# Altium PCB ESP32-USBC.PcbDoc (part 3 of 3)
Units mil, origin at the board's own origin, x right, y up, seen from the top; angles counter-clockwise.
Board outline 2700 x 1000 mil, 4 copper layers (L1, L2, L3, L4), stack 61.583 mil thick; 64 components, 73 nets, 299 pads, 160 vias.
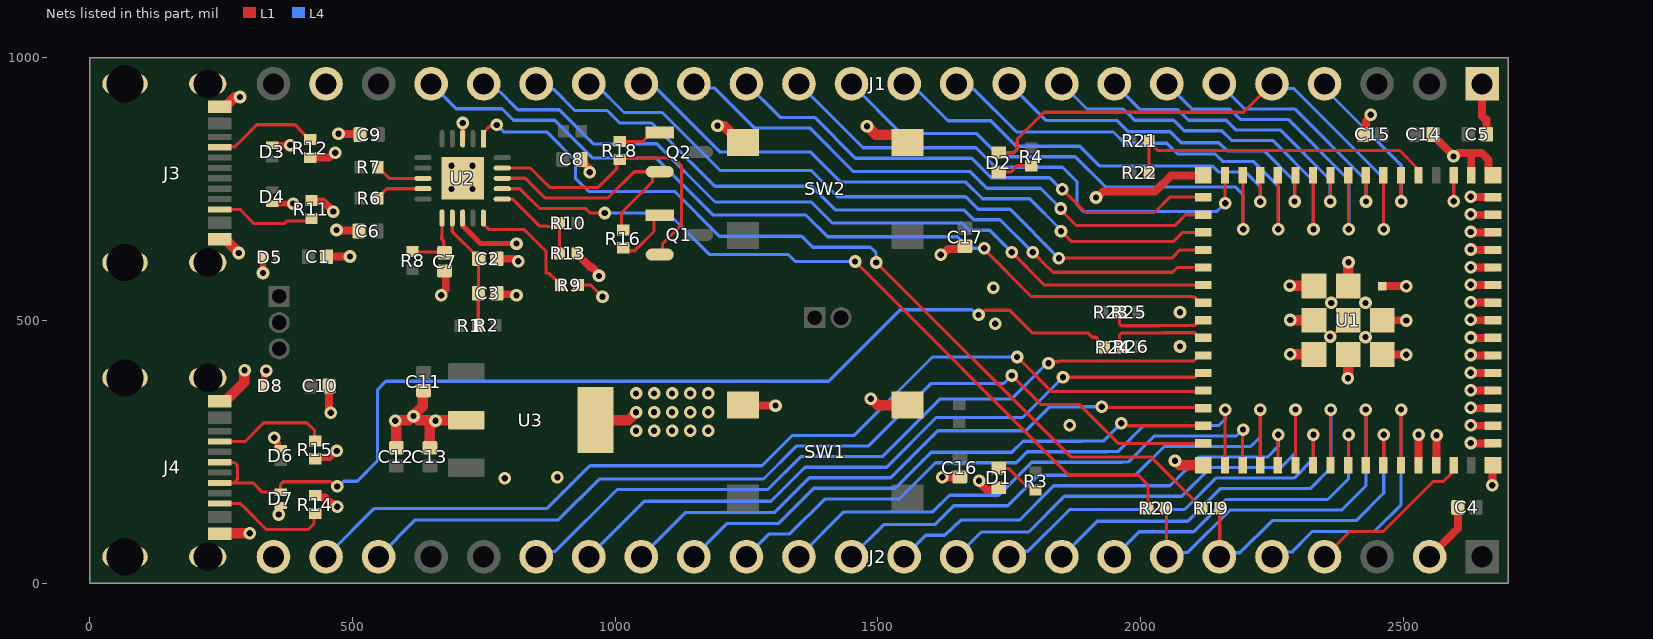
[diagram p4: the nets of this part, all layers, seen from the top]

## Via types
v1: diameter 24, hole 12, L1 to L4, tented both sides, 160 vias

## Nets (pads, with @x,y where several pads share a name; then routed paths per layer and width w, separated by ;. In a path a pad name is that pad's centre, name@x,y a point inside that pad or via, vN(x,y) a via of type N, cw(c..) or ccw(c..) an arc to the next point about the centre after c; other vN are vias at no path point) (continued)
CONN2_USB_P: D7.2 J4.A6 J4.B6 R24.1 | length 2039.3
  L1 w6.03: J4.B6@247.64,190.55 311.05,190.55 328.65,172.95 D7.2@363.65,172.95 363.65,187.64 368.79,192.79 458.68,192.79 467.67,183.8 v1(471.2,183.8) ; J4.A6@247.64,229.92 248.15,229.41 275.79,229.41 281.29,223.91 281.29,197.22 275.77,191.7 ; v1(1691.7,510.2) 1695.23,510.2 1704.22,519.18 1751.32,519.18 1795.02,475.48 1900.5,475.48 1908.3,467.68 1915.49,467.68 1915.49,465.68 1930.99,450.18 R24.1@1930.99,449
  L4 w6.03: v1(471.2,183.8) 473.8,183.8 483.72,193.72 509.26,193.72 547.9,232.36 547.9,367.9 563.82,383.82 1406.48,383.82 1542.84,520.17 1679.18,520.17 1689.15,510.2 v1(1691.7,510.2)
DTR_FTDI: Q2.2 R16.1 U2.18 | length 474.6
  L1 w6: U2.18@785.57,770.16 814.84,770.16 ; 814.68,770 815,770.32 829.18,770.32 861.8,737.7 866.65,732.85 986.65,732.85 1036.4,782.6 Q2.2@1077.09,782.6 ; R16.1@1015.9,671.91 1012.56,675.25 1012.56,704.95 1071.31,763.7 1071.31,776.81 Q2.2@1077.09,782.6 ; Q2.2@1085,782.6 Q2.2@1077.09,782.6
ESP_USB_N: R23.2 R25.2 U1.23 | length 188.1
  L1 w6.03: R25.2@1960.98,515 1960.03,514.05 1960.03,493.24 1963.57,489.71 2034.29,489.71 2034.86,490.28 2103.18,490.28 2106.72,493.82 2106.72,495.14 2111.57,500 U1.23@2119.45,500
ESP_USB_P: R24.2 R26.2 U1.24 | length 191.1
  L1 w6.03: R24.2@1965.01,449 1960.03,453.97 1960.03,472.15 1963.57,475.68 2040.1,475.68 2040.68,476.25 2103.18,476.25 2106.72,472.72 2106.72,471.39 2111.57,466.54 U1.24@2119.45,466.54
FTDI_RESET: C7.2 R8.2 U2.11 | length 118.8
  L1 w6: R8.2@614.61,630.66 615.67,629.6 674.57,629.6 C7.2@675.62,628.55 673.88,630.3 673.88,650.29 670.32,653.85 670.32,660.36 670.79,660.83 U2.11@670.79,683.06
FTDI_USB_N: R6.2 U2.9 | length 93.9
  L1 w6.03: R6.2@548.9,732.19 548.9,733.37 565.85,750.32 591.66,750.32 U2.9@634.59,750.32
FTDI_USB_P: R7.2 U2.8 | length 95.5
  L1 w6.03: R7.2@548.56,791.2 548.56,790.02 556.17,782.4 557.56,782.4 569.97,770 591.66,770 U2.8@634.59,770
GND: C1.1 C2.1 C3.1 C4.1 C5.1 C6.1 C7.1 C8.1 C9.1 C10.1 C11.1 C12.1 C13.1 C14.1 C15.1 C16.1 C17.1 D1.1 D3.1 D4.1 D5.1 D6.1 D7.1 D8.1 J1.1 J1.23 J2.2 J2.24 J3.A1B12 J3.B1A12 J3.S1 J3.S2 J3.S3 J3.S4 J4.A1B12 J4.B1A12 J4.S1 J4.S2 J4.S3 J4.S4 R9.2 R11.1 R12.1 R13.1 R14.1 R15.1 SW1.3 SW1.4 SW2.3 SW2.4 U1.1 U1.2 U1.42 U1.43 U1.46 U1.47 U1.48 U1.49 U1.50 U1.51 U1.52 U1.53 U1.54 U1.55 U1.56 U1.57 U1.58 U1.59 U1.60 U1.61 U1.62 U1.63 U1.64 U1.65 U1.66 U1.67 U1.68 U1.69 U1.70 U1.71 U1.72 U1.73 U2.3 U2.13 U2.21 U3.2 U3.4 | length 4059.7
  L1 w6: R9.2@930.05,567.05 953.95,567.05 v1(976,545) ; v1(2360.55,469) 2364.04,469 U1.61@2395.04,500 ; U1.2@2595.83,775.59 2595.83,726.57 v1(2596.11,726.28)
  L1 w10.01: U2.13@710,694.59 710,680.2 723.15,667.05 744.01,646.19 812.26,646.19 v1(812.55,645.9) ; U2.3@710,845.41 v1(710,875.33)
  L1 w12: v1(330,590) D5.1@330,620 ; D8.1@331.3,375.1 332.19,375.99 332.19,397.1 336.1,401 v1(336.1,404.25) ; D4.1@347.32,722.06 v1(387.32,722.06) ; D3.1@347.3,833.1 347.45,833.25 381.9,833.25 v1(382.05,833.4) ; v1(351.35,276.35) 351.35,273.1 357.94,266.51 357.94,256.18 358.83,255.29 D6.1@363.75,255.29 ; v1(360.3,130.3) 361.97,131.97 361.97,146.47 362.86,147.36 D7.1@363.65,147.36
  L1 w15: R12.1@420,810 456.08,810 464.93,818.85 v1(467.36,818.85) v1@465.64,817.13 ; R11.1@422.3,727.81 424.3,725.81 444.56,725.81 v1(463.55,706.82) ; R14.1@429.65,166.31 432.78,163.18 448.58,163.18 459.86,151.9 462.11,151.9 468.81,145.2 v1(471.25,145.2) ; R15.1@429.65,236.39 432.78,239.52 456.24,239.52 468.11,251.4 v1(470.55,251.4) ; C1.1@451.11,620.95 451.29,621.12 495.47,621.12 v1(495.65,621.3) ; C10.1@456.05,375.15 456.05,369 455.53,368.48 455.53,329.81 458.9,326.44 v1(458.9,324) ; v1(469.95,671.77) 470.99,670.74 511.52,670.74 C6.1@512.56,669.7 ; v1(473.7,854.95) 474.57,854.08 513.75,854.08 C9.1@514.62,853.21 ; v1(669.1,547.75) 669.1,550.19 677.76,558.85 677.76,591.85 C7.1@675.62,593.98 ; C3.1@774.88,551.35 776.81,549.42 810.79,549.42 v1(812.52,547.7) ; C2.1@775.05,617.01 808.66,617.01 813.41,612.25 v1(815.85,612.25) ; R13.1@928.21,627.06 928.21,625.88 952.55,601.54 955.69,601.54 967.78,589.45 967.78,586.12 v1(969.5,584.4) ; C8.1@935.1,806.25 935.1,804.68 949.83,789.95 949.83,783.17 v1(951.55,781.45) ; SW1.4@1243.5,338.58 1244.39,337.7 v1(1305.35,337.7) ; v1(1619.9,624.6) 1622.34,624.6 1633.35,635.62 1660.9,635.62 C17.1@1666,640.72 ; v1@1622,200.25 v1(1622.88,201.12) 1655.12,201.12 C16.1@1656,202 ; v1@1692.7,192.01 v1(1692.7,194.45) 1692.7,191.79 1707.5,176.99 1725.69,176.99 D1.1@1730,181.3 ; v1(1915.27,733.65) 1917.2,733.65 1928.55,745 2027.54,745 2058.13,775.59 U1.63@2119.45,775.59 ; C15.1@2424.13,853.55 2428.6,858.02 2428.6,879.22 2438.04,888.66 v1(2438.04,891.09) ; U1.68@2460,435.04 v1@2505.04,435.04 ; U1.67@2460,500 v1@2505.04,500 ; U1.66@2460,564.96 v1@2505.04,564.96 ; v1@2528.9,282 U1.42@2528.9,224.41 U1.42@2528.95,224.46 ; J2.2@2550,50 2603.72,103.72 C4.1@2603.72,144 ; C14.1@2556.47,853.55 2556.47,851.98 2595.4,813.04 v1(2595.4,811.75) 2597.84,811.75 2604.23,818.15 2624.5,818.15 ; U1.43@2562.36,224.41 2562.74,224.78 2562.74,280.54 v1(2563.24,281.04) ; U1.2@2595.4,784.64 2595.45,784.59 2595.45,775.96 U1.2@2595.83,775.59 ; v1@2628.79,265.75 U1.46@2670.63,265.75 ; v1@2628.79,299.21 U1.47@2670.63,299.21 ; v1@2628.79,332.68 U1.48@2670.63,332.68 ; v1@2628.79,366.14 U1.49@2670.63,366.14 ; v1@2628.79,399.61 U1.50@2670.63,399.61 ; v1@2628.79,433.07 U1.51@2670.63,433.07 ; v1@2628.79,466.54 U1.52@2670.63,466.54 ; v1@2628.79,500 U1.53@2670.63,500 ; v1@2628.79,533.46 U1.54@2670.63,533.46 ; v1@2628.79,566.93 U1.55@2670.63,566.93 ; v1@2628.79,600.39 U1.56@2670.63,600.39 ; v1@2628.79,633.86 U1.57@2670.63,633.86 ; v1@2628.79,667.32 U1.58@2670.63,667.32 ; v1@2628.79,700.79 U1.59@2670.63,700.79 ; v1@2628.79,734.25 U1.60@2670.63,734.25 ; U1.1@2629.29,775.59 2629.29,813.35 2624.5,818.15 ; J1.1@2650,950 2650,888 2656.32,881.68 ; C5.1@2657.97,855.97 2657.97,881.68 ; v1(2668.9,186.2) 2669.76,187.06 2669.76,223.54 U1.65@2670.63,224.41 ; U1.62@2670.63,775.59 2662.38,783.84 2662.38,804.87 2649.1,818.15 2624.5,818.15
  L1 w20: J4.B1A12@247.64,94.09 248.09,94.55 304.55,94.55 v1(305,95) ; J4.A1B12@247.64,346.06 249.45,347.87 260.28,347.87 294.23,381.83 294.23,404.23 v1(295,405) ; J3.B1A12@247.64,653.94 258.46,653.94 283.85,628.55 v1(283.85,627.95) ; J3.A1B12@247.64,905.91 258.46,905.91 276.54,923.98 285.43,923.98 v1(286.2,924.75) ; C12.1@583.7,257.42 583.7,305.92 581.75,307.87 v1(581.75,308.95) 582.52,309.72 607.3,309.72 615.28,317.7 v1(616.37,317.7) ; C11.1@634.09,366.05 634.09,336.51 616.37,318.78 v1(616.37,317.7) ; C13.1@647.5,259.53 647.5,296.77 658.35,307.62 v1(658.35,308.7) ; U3.2@716.97,310 716.32,309.35 659,309.35 v1(658.35,308.7) ; U3.4@963.03,310 1025,310 v1(1040,325) ; v1(1195,870) 1195.77,869.23 1207.93,869.23 1238.58,838.58 SW2.4@1243.5,838.58 ; v1@1479.4,867.87 v1(1479.4,868.95) v1@1479.8,868.95 ; v1@1480.95,870.1 v1@1479.8,868.95 ; v1(1486.6,350.7) 1487.68,350.7 1499.8,338.58 SW1.3@1556.5,338.58 ; SW2.3@1556.5,838.58 1541.63,853.45 1495.98,853.45 1480.48,868.95 v1@1479.8,868.95 ; v1(2065.55,232.75) 2066.63,232.75 2074.97,224.41 U1.64@2119.45,224.41 ; v1(2284,566) 2284.52,565.48 2329.56,565.48 U1.71@2330.08,564.96 ; v1@2285.04,435.04 U1.73@2330.08,435.04 ; v1@2285.04,500 U1.72@2330.08,500 ; v1@2395.04,390 U1.70@2395.04,435.04 ; U1.69@2395.04,564.96 v1@2395.04,610 ; C5.1@2656.32,855.97 C5.1@2658.28,854 ; v1(616.37,317.7) 617.45,317.7 625.68,309.47 657.58,309.47 v1(658.35,308.7)
  other v1: 790.05,199.65 890.35,201.55 2628.04,266.5 2529,282 1040,290 1074.26,290 1108.53,290 1142.79,290 1177.05,290 1865,300 2628.04,299.96 1074.26,325 1108.53,325 1142.79,325 1177.05,325 2628.04,333.43 1040,360.8 1074.26,360.8 1108.53,360.8 1142.79,360.8 1177.05,360.8 2628.04,366.89 2394.52,389.48 2628.04,400.35 2628.04,433.82 2505.56,434.52 2284.52,435.56 2075,450 2628.04,467.28 2428,468 1723.4,493.2 2505.56,499.48 2284.52,500.52 2628.04,500.75 2075,515 2363,533 2428,533 2628.04,534.21 1720,562 2505.56,564.44 2628.04,567.68 2628.04,601.14 2395.56,610.52 2628.04,634.61 2628.04,668.07 2628.04,701.54 2628.04,735 688.86,749.66 728.56,749.66 688.86,793.86 728.56,793.86
GPIO0: R21.2 R22.2 U1.4 | length 608.3
  L1 w6: R22.2@2015.85,780.5 R21.2@2015.85,841.2 2015.85,840.02 2032.87,823 2492.86,823 2526.02,789.84 2526.02,778.46 U1.4@2528.9,775.59
GPIO1: J1.4 U1.5 | length 334.3
  L1 w6: U1.5@2495.43,775.59 2495.72,775.31 2495.72,726.28 v1(2496,726)
  L4 w6: J1.4@2350,950 2350,940.95 2496,794.95 v1(2496,726)
GPIO2: D2.1 J1.5 U1.6 | length 1071
  L1 w6: D2.1@1730,818.7 1758.78,818.7 1765.19,825.11 1765.19,844.84 1816.2,895.85 2195.85,895.85 J1.5@2250,950 ; v1@2461.97,673.96 U1.6@2461.97,775.59
  L4 w6: J1.5@2250,950 2258.65,941.35 2290.95,941.35 2462.45,769.85 v1(2462.45,673.48)
GPIO3: J1.6 U1.7 | length 449.3
  L1 w6: U1.7@2428.5,775.59 2428.75,775.34 2428.75,724.25 v1@2429,724
  L4 w6: J1.6@2150,950 2197.75,902.25 2293.2,902.25 2429,766.45 v1@2429,724
  other v1: 2429,726
GPIO4: J1.7 U1.8 | length 618.8
  L1 w6: U1.8@2395.04,775.59 2395.52,775.11 2395.52,673.48 v1(2396,673)
  L4 w6: J1.7@2050,950 2098.35,901.65 2170.07,901.65 2189.47,882.25 2280.75,882.25 2396,767 v1(2396,673)
GPIO5: J1.8 U1.9 | length 581.2
  L1 w6: v1@2361.29,722.29 2361.29,775.3 U1.9@2361.57,775.59
  L4 w6: J1.8@1950,950 1999.45,900.55 2071.17,900.55 2091.17,880.55 2162.88,880.55 2181.18,862.25 2265.65,862.25 2361,766.9 v1(2361,726)
GPIO6: J1.9 U1.10 | length 750.6
  L1 w6: U1.10@2328.11,775.59 2328.59,775.07 2328.59,673.48 v1(2329.07,673)
  L4 w6: J1.9@1850,950 1898.1,901.9 1967.2,901.9 1988.55,880.55 2062.88,880.55 2082.88,860.55 2154.6,860.55 2172.9,842.25 2251.7,842.25 2329.07,764.88 v1(2329.07,673)
GPIO7: J1.10 U1.11 | length 712.6
  L1 w6: v1@2293.82,721.82 2293.82,774.77 U1.11@2294.65,775.59
  L4 w6: J1.10@1750,950 1819.75,880.25 1954.77,880.25 1976.22,858.8 2056.35,858.8 2077.3,837.85 2149.01,837.85 2164.61,822.25 2235.55,822.25 2293,764.8 v1(2293,726)
GPIO8: J1.11 U1.12 | length 877.7
  L1 w6: U1.12@2261.18,775.59 2261.66,775.07 2261.66,673.48 v1(2262.14,673)
  L4 w6: J1.11@1650,950 1660.33,939.67 1682.73,939.67 1722.8,899.6 1723.03,899.6 1764.43,858.2 1948.53,858.2 1969.88,836.85 2050.01,836.85 2070.41,816.45 2142.13,816.45 2156.33,802.25 2214.55,802.25 2262.14,754.66 v1(2262.14,673)
GPIO9: J1.12 U1.13 | length 837.5
  L1 w6: U1.13@2227.72,775.59 2227.86,775.45 2227.86,725.74 v1(2228,725.6)
  L4 w6: J1.12@1550,950 1563.15,950 1633.55,879.6 1714.75,879.6 1763.15,831.2 1884.18,831.2 1921.53,793.85 2136.44,793.85 2148.04,782.25 2199.5,782.25 2228,753.75 v1(2228,725.6)
GPIO10: J1.13 U1.14 | length 1001.5
  L1 w6: U1.14@2194.23,775.57 2194.73,775.07 2194.73,673.48 v1(2195.21,673)
  L4 w6: J1.13@1450,950 1544.9,855.1 1688.33,855.1 1732.23,811.2 1875.9,811.2 1933.2,753.9 2180.1,753.9 2195.21,738.79 v1(2195.21,673)
GPIO11: J1.14 U1.15 | length 996.8
  L1 w6: v1(2160.85,722.95) U1.15@2160.79,775.59
  L4 w6: J1.14@1350,950 1471.7,828.3 1686.85,828.3 1723.95,791.2 1851.5,791.2 1878.9,763.8 1878.9,719.8 1892.05,706.65 2144.55,706.65 v1(2160.85,722.95)
GPIO12: J1.15 U1.16 | length 983
  L1 w6: v1(1851.1,749.25) 1895.35,705 2026.43,705 2055.68,734.25 U1.16@2119.45,734.25
  L4 w6: J1.15@1250,950 1314,886 1379.7,886 1457.4,808.3 1678.56,808.3 1715.66,771.2 1826.84,771.2 1848.79,749.25 v1(1851.1,749.25)
GPIO13: J1.16 U1.17 | length 1091.5
  L1 w6: v1(1848.25,712.6) 1848.25,709.8 1878.05,680 2064.67,680 2085.46,700.79 U1.17@2119.45,700.79
  L4 w6: J1.16@1150,950 1157.88,942.12 1188.58,942.12 1264.7,866 1370.5,866 1453.7,782.8 1675.78,782.8 1707.38,751.2 1809.65,751.2 v1(1848.25,712.6)
GPIO14: J1.17 U1.18 | length 1202.1
  L1 w6: v1(1848.6,669.65) 1868.25,650 2062.95,650 2080.27,667.32 U1.18@2119.45,667.32
  L4 w6: J1.17@1050,950 1060.33,939.67 1080.33,939.67 1200,820 1372.5,820 1429.7,762.8 1667.49,762.8 1699.09,731.2 1789.12,731.2 1848.6,671.72 v1(1848.6,669.65)
GPIO15: J1.18 U1.19 | length 1313.3
  L1 w6: v1(1844.6,618.25) 2059.49,618.25 2075.09,633.86 U1.19@2119.45,633.86
  L4 w6: J1.18@950,950 962.4,950 1017.02,895.38 1089.62,895.38 1200,785 1373.2,785 1423.2,735 1667.01,735 1690.81,711.2 1751.65,711.2 v1(1844.6,618.25)
GPIO16: J1.19 U1.20 | length 1421.8
  L1 w6: v1(1794.55,629.2) 1823.36,600.39 1824.27,600.39 1833.42,591.25 2060.77,591.25 2069.91,600.39 U1.20@2119.45,600.39
  L4 w6: J1.19@850,950 860.33,939.67 882.98,939.67 923.45,899.2 984.92,899.2 1008.73,875.38 1069.62,875.38 1190,755 1374.25,755 1419.25,710 1663.73,710 1682.53,691.2 1732.55,691.2 v1(1794.55,629.2)
GPIO17: J1.20 U1.21 | length 1528.5
  L1 w6: v1(1755,629.2) 1817.27,566.93 U1.21@2119.45,566.93
  L4 w6: J1.20@750,950 764.61,950 780,934.62 781.08,934.62 815.1,900.6 893.77,900.6 940.45,853.92 940.45,853.57 956.27,837.75 956.62,837.75 958.7,835.67 1014.48,835.67 1014.71,835.9 1079.25,835.9 1190.15,725 1373.6,725 1413.6,685 1660.44,685 1674.24,671.2 1713,671.2 v1(1755,629.2)
GPIO18: J1.21 U1.22 | length 1644.6
  L1 w6: v1(1702.55,637.1) 1702.55,634.9 1792.45,545 2096.54,545 2097.49,544.06 2102.84,544.06 2108.7,538.2 2108.7,536.34 2111.57,533.46 U1.22@2119.45,533.46
  L4 w6: J1.21@650,950 697.5,902.5 784.92,902.5 806.82,880.6 885.48,880.6 920.45,845.63 920.45,845.28 957.28,808.45 1078.41,808.45 1186.86,700 1363.35,700 1404.5,658.85 1651.15,658.85 1672.9,637.1 v1(1702.55,637.1)
GPIO21: J2.19 U1.25 | length 1428.1
  L1 w6: v1(1824.86,418.41) 1827.54,421.09 1843.5,421.09 1844.9,422.48 2100.98,422.48 2108.7,430.2 2116.57,430.2 U1.25@2119.45,433.07
  L4 w6: J2.19@850,50 860.21,60.21 886.26,60.21 1003.95,177.9 1290.71,177.9 1353.26,240.45 1508.36,240.45 1617.91,350 1753.57,350 1821.97,418.41 v1(1824.86,418.41)
GPIO26: J2.18 U1.26 | length 1314.3
  L1 w6: v1(1852.3,391.7) 2103.67,391.7 2111.57,399.61 U1.26@2119.45,399.61
  L4 w6: J2.18@950,50 1055.55,155.55 1296.65,155.55 1361.55,220.45 1516.65,220.45 1611.2,315 1775.6,315 v1(1852.3,391.7)
GPIO33: J2.17 U1.28 | length 1188.8
  L1 w6: v1(1926.3,335.35) 1927.64,334.01 2118.11,334.01 U1.28@2119.45,332.68
  L4 w6: J2.17@1050,50 1134.4,134.4 1303.78,134.4 1369.83,200.45 1524.93,200.45 1614.38,289.9 1781.72,289.9 1827.17,335.35 v1(1926.3,335.35)
GPIO34: J2.16 U1.29 | length 1076.7
  L1 w6: v1(1963.05,304.05) 1966.84,304.05 1971.68,299.21 U1.29@2119.45,299.21
  L4 w6: J2.16@1150,50 1213.5,113.5 1311.17,113.5 1378.12,180.45 1533.22,180.45 1601.57,248.8 1755.13,248.8 1776.23,269.9 1889.13,269.9 1889.23,270 1929,270 v1(1963.05,304.05)
GPIO35: J2.15 U1.31 | length 1142.8
  L1 w6: U1.31@2160.79,224.41 2160.89,224.52 2160.89,329.89 v1(2161,330)
  L4 w6: J2.15@1250,50 1293.5,93.5 1329.36,93.5 1332.2,93.5 1400,160 1541.05,160 1609.85,228.8 1763.41,228.8 1784.51,249.9 1937.18,249.9 1937.28,250 1956.48,250 2006.23,299.75 2148.75,299.75 2161,312 v1(2161,330)
GPIO36: J2.14 U1.32 | length 1012.1
  L1 w6: U1.32@2194.25,224.41 v1@2194.25,291.25
  L4 w6: J2.14@1350,50 1435.35,135.35 1604.63,135.35 1636.33,167.05 1729.95,167.05 1792.8,229.9 1964.67,229.9 1964.77,230 1976.31,230 2026.06,279.75 2182.14,279.75 2194.39,292 v1(2195,292)
GPIO37: J2.13 U1.33 | length 1030.1
  L1 w6: U1.33@2227.72,224.41 2227.83,224.53 2227.83,329.9 v1(2227.95,330.02)
  L4 w6: J2.13@1450,50 1511.05,111.05 1608.62,111.05 1644.62,147.05 1747.05,147.05 1805,205 1990,205 2044.75,259.75 2209.75,259.75 2227.95,277.95 v1(2227.95,330.02)
GPIO38: J2.12 U1.34 | length 878
  L1 w6: U1.34@2261.18,224.41 2261.55,224.78 v1@2261.55,282
  L4 w6: J2.12@1550,50 1591.05,91.05 1624.64,91.05 1627.11,91.05 1658.67,120 1770,120 1835,185 2055.98,185 2110.53,239.55 2241.55,239.55 2261.93,259.93 v1(2261.93,282)
GPIO39: J2.11 U1.35 | length 914.7
  L1 w6: U1.35@2294.66,224.43 2294.76,224.53 2294.76,329.9 v1(2294.88,330.02)
  L4 w6: J2.11@1650,50 1697,97 1787,97 1855,165 2078.45,165 2133,219.55 2266.55,219.55 2294.88,247.88 v1(2294.88,330.02)
GPIO40: J2.10 U1.36 | length 759.4
  L1 w6: U1.36@2328.11,224.41 2328.48,224.78 v1@2328.48,282
  L4 w6: J2.10@1750,50 1760.33,60.33 1785.42,60.33 1865.08,140 2083.72,140 2143.27,199.55 2292.07,199.55 2328.86,236.34 v1(2328.86,282)
GPIO41: J2.9 U1.37 | length 798.6
  L1 w6: U1.37@2361.57,224.41 2361.69,224.53 2361.69,329.9 v1(2361.81,330.02)
  L4 w6: J2.9@1850,50 1917.6,117.6 2089.6,117.6 2151.55,179.55 2322.55,179.55 2361.81,218.81 v1(2361.81,330.02)
GPIO42: J2.8 U1.38 | length 648.4
  L1 w6: U1.38@2395.04,224.41 2395.41,224.78 v1@2395.41,282
  L4 w6: J2.8@1950,50 1997.55,97.55 2100.92,97.55 2162.22,158.85 2355.85,158.85 2395.79,198.79 v1(2395.79,282)
GPIO45: J2.5 U1.41 | length 573.3
  L1 w6: U1.41@2495.45,224.43 2495.55,224.53 2495.55,329.9 v1(2495.67,330.02)
  L4 w6: J2.5@2250,50 2258.88,58.88 2287.58,58.88 2326.8,98.1 2444.65,98.1 2495.67,149.12 v1(2495.67,330.02)
GPIO46: J2.4 U1.44 | length 324.7
  L1 w6: J2.4@2350,50 2398.1,98.1 2461.9,98.1 2556.97,193.17 2575.96,193.17 2592.95,210.16 2592.95,221.54 U1.44@2595.83,224.41
GPIO47: J2.23 U1.27 | length 1854.5
  L1 w6: v1(1765,430) 1830.3,364.7 2118.01,364.7 U1.27@2119.45,366.14
  L4 w6: J2.23@450,50 542.05,142.05 870.75,142.05 952,223.3 1279.54,223.3 1336.69,280.45 1454.53,280.45 1604.08,430 v1(1765,430)
GPIO48: J2.22 U1.30 | length 1765.9
  L1 w6: v1(1755,395) 1810,340 1883.47,340 1957.72,265.75 U1.30@2119.45,265.75
  L4 w6: J2.22@550,50 620.05,120.05 892.05,120.05 969.75,197.75 995.52,197.75 995.67,197.9 1282.43,197.9 1344.98,260.45 1481.88,260.45 1601.43,380 1740,380 v1(1755,395)
NetC2_2: C2.2 C3.2 R1.2 R2.2 U2.12 | length 214.5
  L1 w6: U2.12@690.32,683.06 690.32,668.76 740.49,618.58 C2.2@740.49,617.01 739.87,616.4 739.87,551.79 C3.2@740.32,551.35 739.79,550.82 739.79,490.73 R2.2@739.26,490.2
NetD1_2: D1.2 R3.1 | length 87.3
  L1 w6: D1.2@1730,218.7 1730.7,218 1749,218 1783.42,183.58 1793.61,183.58 R3.1@1800.1,177.08
NetD2_2: D2.2 R4.1 | length 67.3
  L1 w6: D2.2@1730,781.3 1730.69,781.98 1752.92,781.98 1764.92,793.98 R4.1@1792,793.98
NetJ3_A5: J3.A5 R12.2 | length 201.9
  L1 w6: J3.A5@247.64,829.13 248.54,830.04 276.26,830.04 290,843.77 318.23,872 391.18,872 407,856.18 407,855.83 418.82,844.02 R12.2@420,844.02
NetJ3_B5: J3.B5 R11.2 | length 190
  L1 w6: J3.B5@247.64,711.02 285.85,711.02 290,706.88 313.03,683.85 370.55,683.85 375.44,688.75 387.74,688.75 388.12,689.13 417.64,689.13 R11.2@422.3,693.79
NetJ4_A5: J4.A5 R15.2 | length 221.8
  L1 w6: J4.A5@247.64,269.29 296.24,269.29 331.8,304.85 413.57,304.85 428.24,290.18 428.24,271.82 R15.2@429.65,270.41
NetJ4_B5: J4.B5 R14.2 | length 225
  L1 w6: J4.B5@247.64,151.18 287,151.18 295,143.18 336.23,101.95 416.5,101.95 427.07,112.52 427.07,129.71 R14.2@429.65,132.29
NetQ1_1: Q1.1 R16.2 | length 113.8
  L1 w6: R16.2@1015.9,637.89 1021.53,632.26 1037.44,632.26 1074.15,668.95 1074.15,693.54 1080.41,699.8 Q1.1@1085,699.8
NetQ2_1: Q2.1 R18.2 | length 83.2
  L1 w6: R18.2@1009,840.02 1052.16,840.02 1069.55,857.4 Q2.1@1085,857.4
NetR9_1: R9.1 U2.15 | length 231.1
  L1 w6: U2.15@749.37,694.59 749.37,683.28 760.24,672.41 827.34,672.41 839.39,660.36 868.56,631.19 868.56,589.7 873.56,589.7 880.63,582.63 881.63,582.63 896.04,568.23 R9.1@896.04,567.05
RTS_FTDI: Q1.2 R18.1 U2.19 | length 577.9
  L1 w6: U2.19@785.41,789.68 839.02,789.68 861.8,766.9 875.85,752.85 967.9,752.85 1003.2,788.15 1003.2,800.37 1008.83,806 R18.1@1009,806 ; R18.1@1010.18,806 1013.04,808.86 1111.33,808.86 1126.71,793.48 1126.71,740.95 1126.72,681.86 1090.26,645.4 1090.26,630.26 Q1.2@1085,625
RXD_FTDI: R19.2 U2.1 | length 1706.9
  L1 w6: U2.1@749.6,856.94 757.81,865.16 761.73,869.07 772.32,869.07 v1(775,871.75) ; v1(1496.8,610) 1866.8,240 2018.99,240 2110.18,148.81 2111.36,148.81 2116.99,143.18 R19.2@2116.99,142
  L4 w6: v1(775,871.75) 781.59,865.16 788.8,857.95 861.8,857.95 870.65,857.95 924.55,804.05 924.55,770.27 949.82,745 1113.58,745 1198.58,660 1355,660 1376.15,638.85 1486.1,638.85 1496.78,628.17 v1(1496.8,610)
TXD_FTDI: R20.2 U2.17 | length 1506.9
  L1 w6: U2.17@785.41,750.32 818.68,750.32 856.15,712.85 943.62,712.85 952.27,704.2 v1(980.55,704.2) ; v1(1456.75,611.85) 1863.6,205 1996,205 2013.99,187.01 R20.2@2013.99,142
  L4 w6: v1(980.55,704.2) 1100.8,704.2 1180,625 1330,625 1343.15,611.85 v1(1456.75,611.85)
U0RXD: J2.6 R19.1 U1.40 | length 623.7
  L1 w6: J2.6@2150,50 2150.5,50.5 2150.5,141.5 R19.1@2151.01,142 ; U1.40@2461.97,224.41 v1@2461.97,282
  L4 w6: J2.6@2150,50 2157.51,57.51 2188.96,57.51 2250.3,118.85 2410.33,118.85 2462.72,171.23 v1(2462.72,282)
U0TXD: J2.7 R20.1 U1.39 | length 778.3
  L1 w6: R20.1@2048.01,142 2049,141 2049,51 J2.7@2050,50 ; U1.39@2428.5,224.41 2428.62,224.53 2428.62,329.9 v1(2428.74,330.02)
  L4 w6: J2.7@2050,50 2058.33,58.33 2089.98,58.33 2170.5,138.85 2382.85,138.85 2428.74,184.74 v1(2428.74,330.02)
VBUS_SENSE: R10.1 R13.2 U2.16 | length 191.7
  L1 w6: U2.16@785.41,730.63 805.1,730.63 856.49,679.24 870.63,679.24 871.62,678.26 888.1,678.26 893.73,683.89 R10.1@893.73,685.07 893.96,684.84 893.96,627.29 R13.2@894.19,627.06
pads on no net: J1.24 J3.A8 J3.B8 J4.A8 J4.B8 U2.2 U2.4 U2.5 U2.6 U2.7 U2.14

## Polygon pours and split planes (outlines as drawn)
+3V3_REG on L1 "NONET_L02_P-001" (solid, pour order 51): 537,181 537,226 546,237 572,237 579,237 593,237 622,237 650,237 679,237 687,244 746.25,244 755,237 755,186 744.26,175.26 544.17,175.26
GND on L1 "NONET_L02_P-001" (solid, pour order 53): 557,375.31 563.69,382 676.57,382 683,374.21 750.34,374.21 760.17,386 974,386 1149.35,386 1176,386 1201,364 1201,204 1186,189 931,189 921,199 921,254 910.56,260.69 858,260.69 790,260.69 729,260.69 699,260.69 690,260.69 671,244.69 557,244.69
GND on L1 "NONET_L02_P-001" (solid, pour order 52): 2288,628 2266,606 2266,390 2283,373 2505.46,373 2520.88,389.51 2520.88,609.12 2502,628 2301,628
+5V_VBUS2 on L1 "NONET_L02_P-001" (solid, pour order 50): 355.05,417 338.55,428 338.55,459.05 345.55,466.05 424.55,466.05 435.55,455.05 435.55,329.55 425.05,319.05 348,319.05 348,387 355.05,392.05
+5V_VBUS1 on L1 "NONET_L02_P-001" (solid, pour order 49): 356,604.1 348.9,604.1 347,606 347,663 356,672 425,672 432,665 432,526 429,523 340.5,523 336,526.6 336,564.15 339.85,568 356,568
+3V3_FTDI on L1 "NONET_L02_P-001" (solid, pour order 48): 616,739.06 616,678.32 616,661 594.21,645.23 594.21,615.79 601,609 628,609 628,603 628,597 628,591.06 628,585.06 601.21,585.06 601.21,591.06 595.21,591.06 531.94,654.34 531.92,655.06 531.92,686.06 551.21,686.06 605.21,739.06
+3V3_FTDI on L1 "NONET_L02_P-001" (solid, pour order 47): 845,825 845,795 885,795 885,790 915,790 915,875 885,875
+3V3 on L1 "NONET_L02_P-001" (solid, pour order 46): 2513.64,891.76 2466.28,892.16 2445.05,866.8 2445.05,838.75 2535.1,838.85 2535.2,868.6
+3V3 on L1 "NONET_L02_P-001" (solid, pour order 45): 2327.35,853.55 2344.65,853.15 2364.93,853.43 2365.2,853.55 2365.45,853.66 2366.4,854.56 2366.85,855.35 2367.05,856.35 2367.05,881.1 2340.06,905.55 2301.94,905.55 2278.39,879.99 2278.6,853.02 2319.37,853.27 2326.35,853.55
GND on L2 "NONET_L02_P-001" (solid, pour order 58): 5,995 2685,995 2685,15 5,15
+3V3 on L2 "NONET_L02_P-001" (solid, pour order 54): 2375,115 2590,115 2590,15 2685,15 2685,995 805,995 805,762.91 858,763.03 858,550 933.33,550 1355,550 1355,585 2375,585
+3V3_REG on L2 "NONET_L02_P-001" (solid, pour order 55): 500,225 650,225 980.49,540 1355,540 1355,495 1405,495 1405,555 1470,555 1470,385 945,385 705,145 500,145
GND on L3 (split plane): 2679.9,20.1 20.1,20.1 20.1,979.9 2679.9,979.9

## Silkscreen, mask and mechanical layers (free items; w line width, h text height)
Top Overlay:
  lines w6: 750,95 750,120 ; 750,880 750,905 ; 1250,95 1250,120 ; 1250,880 1250,905 ; 1750,95 1750,120 ; 1750,880 1750,905 ; 2250,95 2250,120 ; 2250,880 2250,905
  text "J1" at 2306,846 h40
  text "USER" at 1701,701 h40
  text "USER/BOOT" at 1221,571 h40
  text "USB1" at 426,536 h40
  text "UART" at 61,526 h40
  text "3V3" at 1226,486 h40
  text "REG" at 1476,486 h40
  text "+5V" at 426,476 h40
  text "ESP" at 66,441 h40
  text "USB2" at 426,416 h40
  text "RESET" at 1321,396 h40
  text "POWER" at 1696,261 h40
  text "J2" at 2286,126 h40
Bottom Overlay:
  text "NC" at 369,884 h40 r90
  text "IO19" at 569,884 h40 r90
  text "IO17" at 769,884 h40 r90
  text "IO16" at 869,884 h40 r90
  text "IO14" at 1069,884 h40 r90
  text "IO12" at 1269,884 h40 r90
  text "IO11" at 1369,884 h40 r90
  text "IO9" at 1569,884 h40 r90
  text "IO7" at 1769,884 h40 r90
  text "IO6" at 1869,884 h40 r90
  text "IO4" at 2069,884 h40 r90
  text "IO2" at 2269,884 h40 r90
  text "IO1" at 2369,884 h40 r90
  text "3V3" at 2569,884 h40 r90
  text "GND" at 469,879 h40 r90
  text "IO18" at 669,879 h40 r90
  text "IO15" at 969,879 h40 r90
  text "IO13" at 1169,879 h40 r90
  text "IO10" at 1469,879 h40 r90
  text "IO8" at 1669,879 h40 r90
  text "IO5" at 1969,879 h40 r90
  text "IO3" at 2169,879 h40 r90
  text "IO0" at 2469,879 h40 r90
  text "GND" at 2669,879 h40 r90
  text "(C)2025 AHMED ELHADY" at 1889,546 h40
  text "ESP32-SAIFELDEEEN-V1" at 1882,417 h40
  text "---<PIN1>---" at 2626,276 h40 r270
  text "GND" at 331,121 h40 r270
  text "IO48" at 531,121 h40 r270
  text "USB+" at 731,121 h40 r270
  text "IO26" at 931,121 h40 r270
  text "IO35" at 1231,121 h40 r270
  text "IO37" at 1431,121 h40 r270
  text "IO40" at 1731,121 h40 r270
  text "IO42" at 1931,121 h40 r270
  text "IO45" at 2231,121 h40 r270
  text "EN" at 2431,121 h40 r270
  text "IO47" at 431,116 h40 r270
  text "USB-" at 631,116 h40 r270
  text "IO21" at 831,116 h40 r270
  text "IO33" at 1031,116 h40 r270
  text "IO34" at 1131,116 h40 r270
  text "IO36" at 1331,116 h40 r270
  text "IO38" at 1531,116 h40 r270
  text "IO39" at 1631,116 h40 r270
  text "IO41" at 1831,116 h40 r270
  text "TXD" at 2031,116 h40 r270
  text "RXD" at 2131,116 h40 r270
  text "IO46" at 2331,116 h40 r270
  text "GND" at 2531,116 h40 r270
  text "3V3" at 2631,116 h40 r270
Top Solder:
  drawing of 12 lines, arcs and shapes, not listed
Board Shape:
  the board outline again, w20

## Text inside footprints (layer, text, board x,y; h text height)
J5: Top Overlay "1" at 288,526 h40